# Altium PCB PowerChargingBoard_2025-02-05.pcbdoc
Units mil, origin at the board's own origin, x right, y up, seen from the top; angles counter-clockwise.
Board outline 3431.47 x 2732.98 mil, 2 copper layers (Top Layer, Bottom Layer); 44 components, 29 nets, 146 pads, 46 vias.
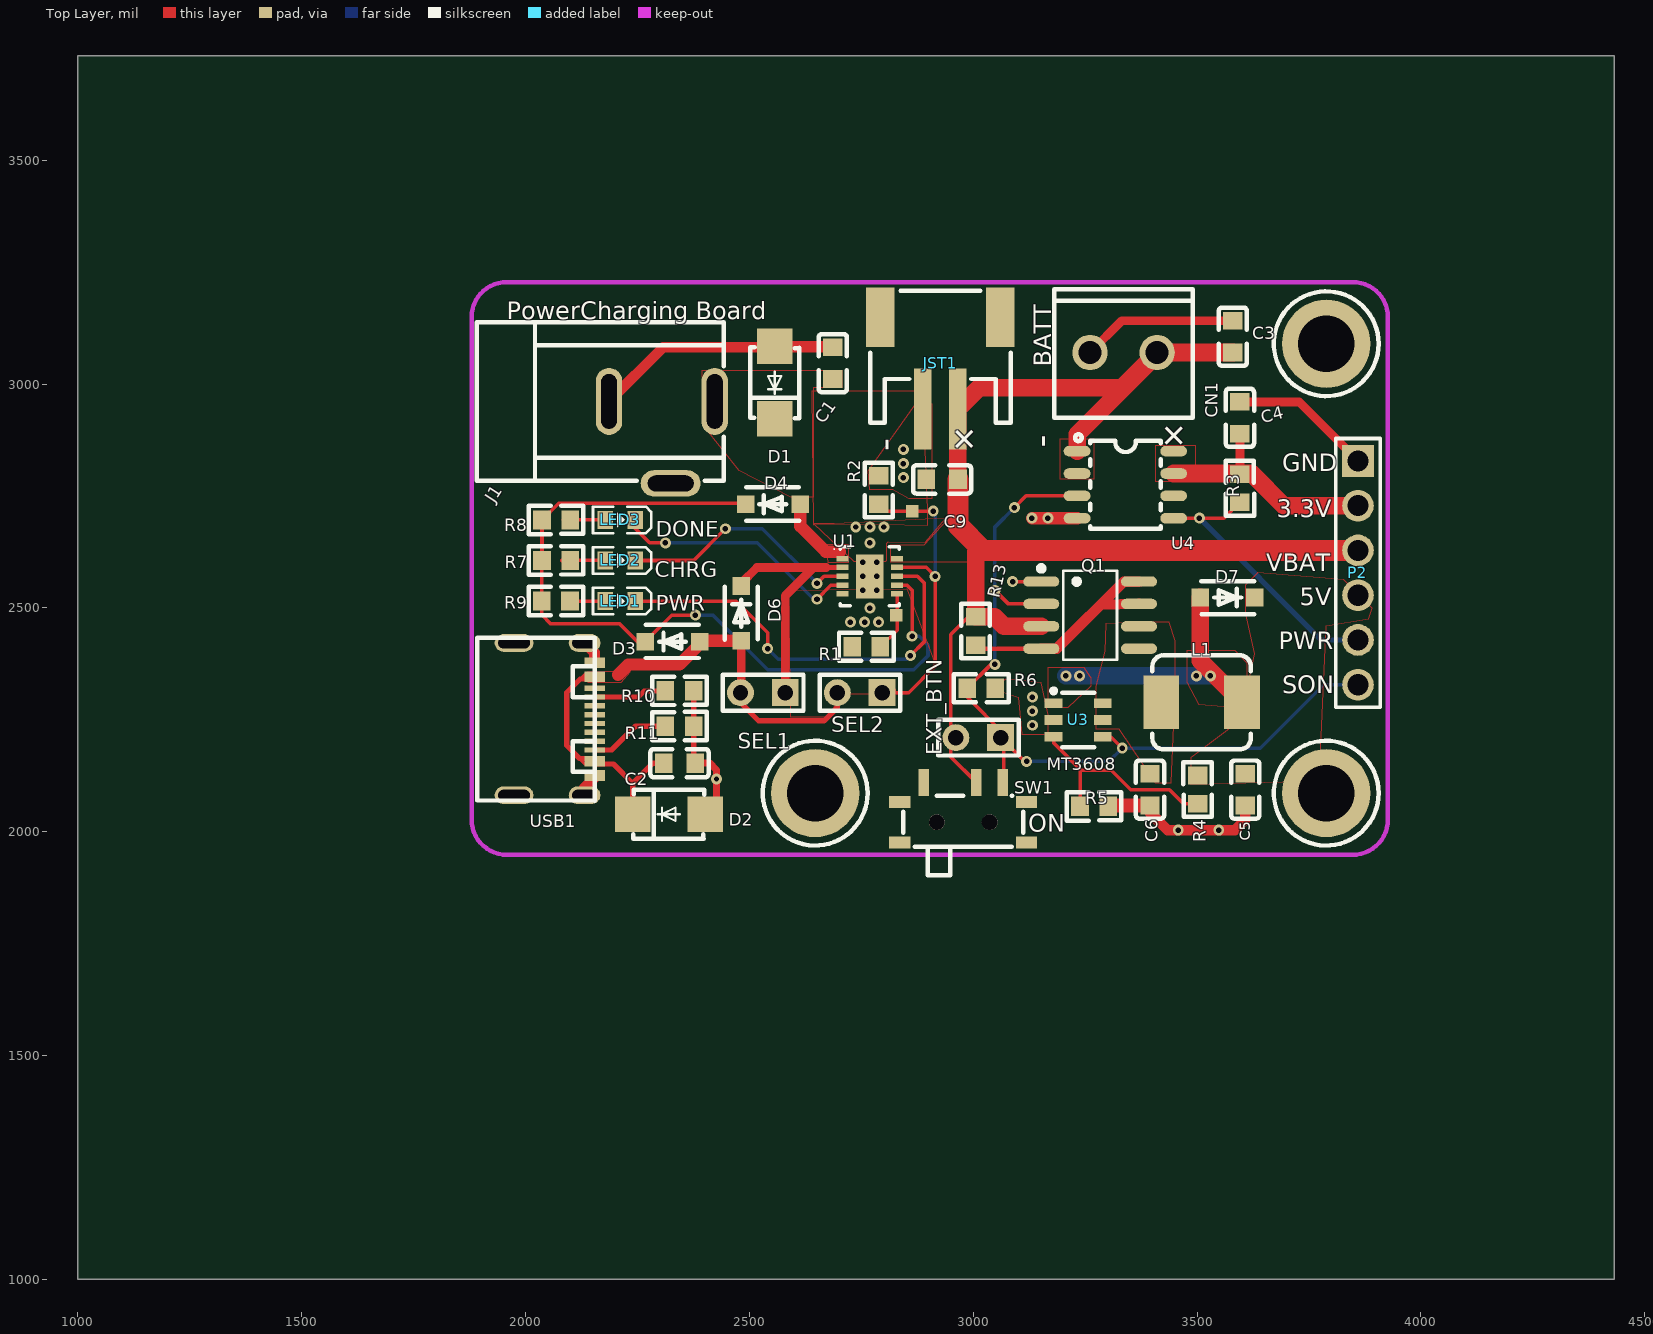
[diagram p0: Top Layer view]
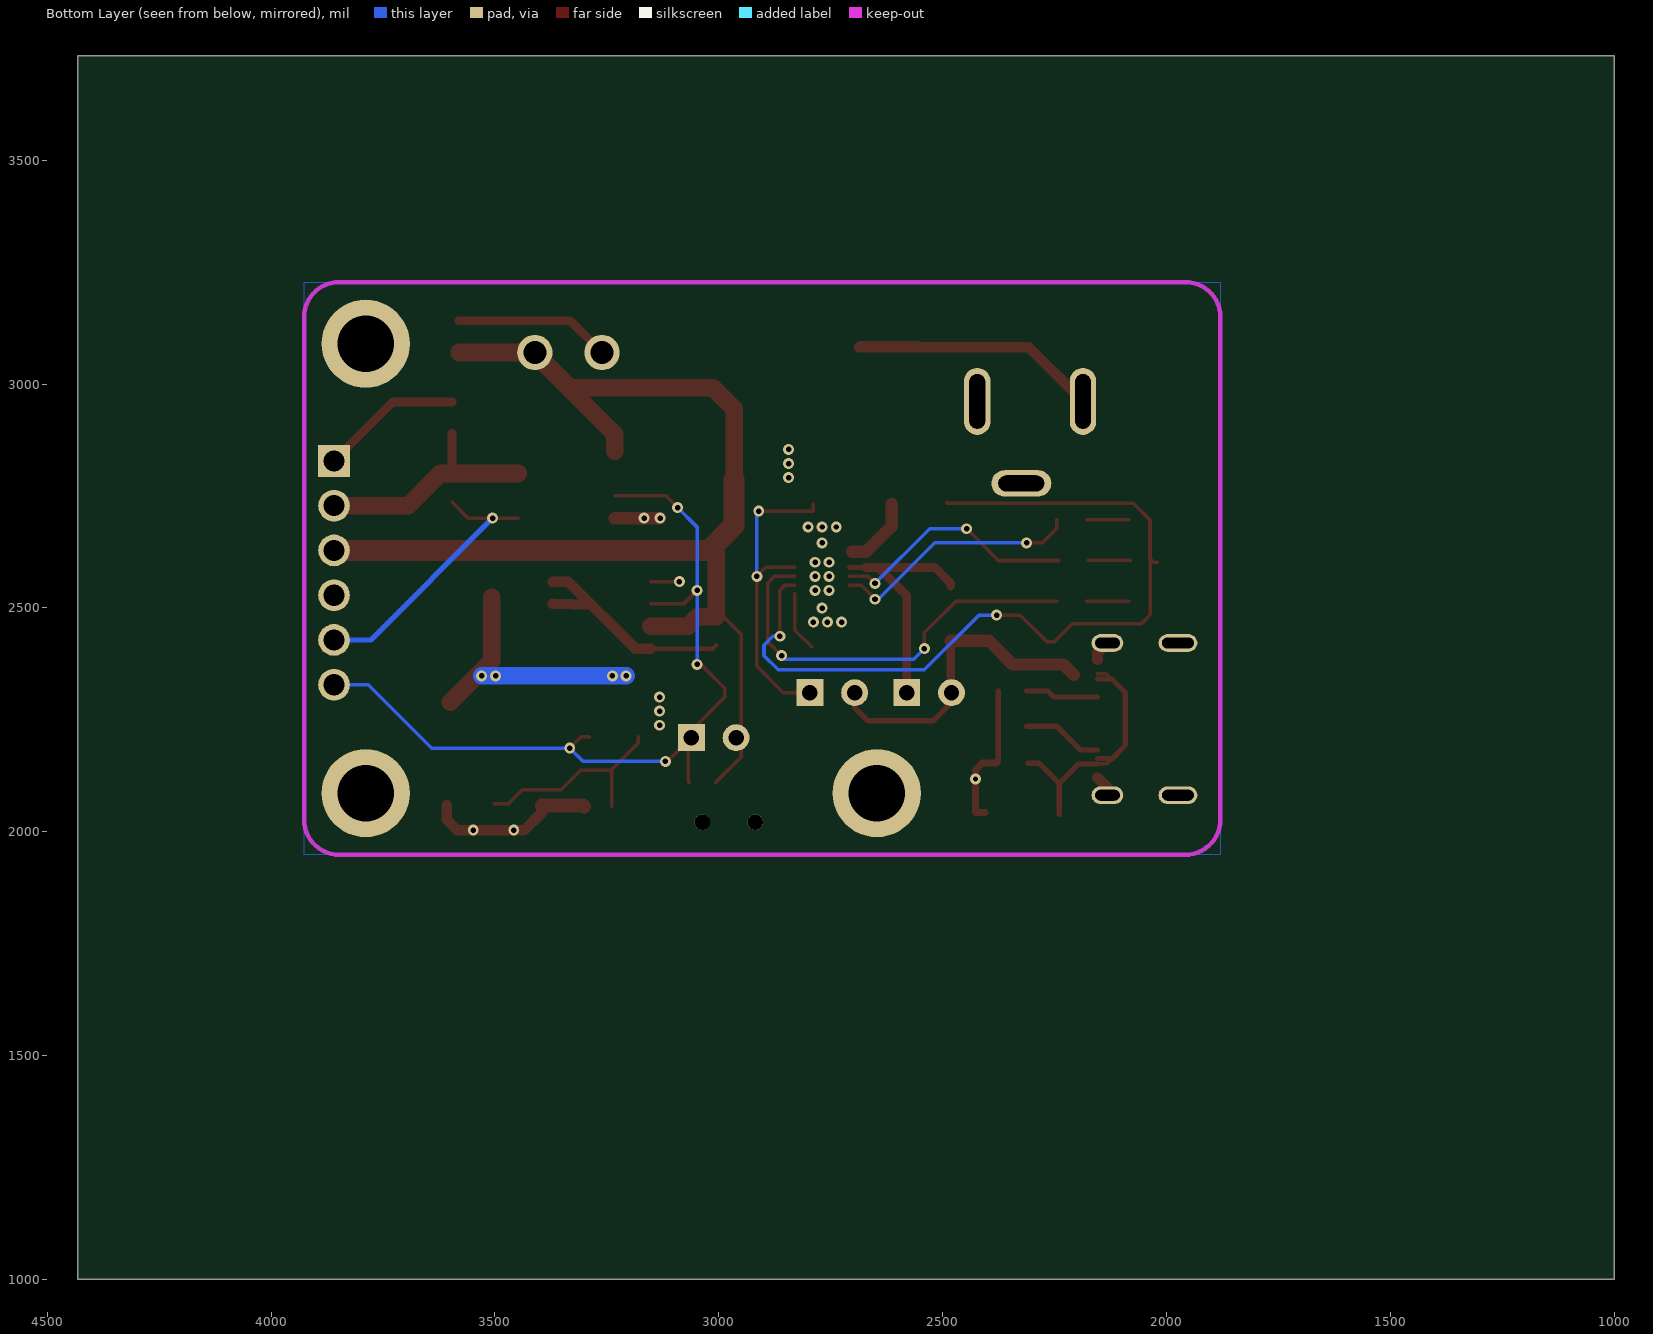
[diagram p1: Bottom Layer view, seen from below]

## Layer stack, top to bottom
Top Solder: solder mask 0.4, Solder Resist, Dk 3.5
Top Layer: signal copper 1.4
Dielectric1: dielectric 12.6, FR-4, Dk 4.8
Bottom Layer: signal copper 1.4
Bottom Solder: solder mask 0.4, Solder Resist, Dk 3.5

## Board outline
4431.47,1000 1000,1000 1000,3732.98 4431.47,3732.98

## Design rules (kind name [scope] priority, off if disabled: settings)
Clearance [All] p1: gap=10
PolygonConnect [All] p1: connectstyle=Relief reliefconductorwidth=10 reliefentries=4 polygonreliefangle="90 Angle" airgapwidth=10
RoutingVias [All] p1: holewidth=28 width=50 viastyle="Through Hole" minholewidth=28 minwidth=50 maxholewidth=28 maxwidth=50
SolderMaskExpansion [All] p1: expansion=4
Width [All] p1: maxlimit=10 minlimit=10 preferedwidth=10
30 further rules are at their usual default settings.

## Components (designator, comment, footprint, x,y, rotation, side; value= is the part's Value field where it differs from the comment)
C1 "4.7uF" C0603 2686.31,3046.88 r270 top
C2 "4.7uF" C0603 2343.79,2153.18 r180 top
C3 "10uF" C0603 3580.01,3105.94 r270 top
C4 "10uF" C0603 3595.76,2924.84 r270 top
C5 "22uF" C0603 3607.57,2094.13 r90 top
C6 "22uF" C0603 3394.97,2094.13 r90 top
C9 "4.7uF" C0603 2930.4,2787.04 r0 top
CN1 "MKDS1/2-3.81-1727010" CONN-TH_2P-P3.81_1727010 3335.91,3070.51 r180 top
D1 "SMAJ5.0A-E3/61" SMA_L4.3-W2.6-LS5.2-RD 2556.39,3003.58 r90 top
D2 "SMAJ5.0A-E3/61" SMA_L4.3-W2.6-LS5.2-RD 2320.17,2039.01 r0 top
D3 "MBR120VLSFT1G" SOD-123F_L2.8-W1.8-LS3.7-RD 2328.04,2424.84 r0 top
D4 "MBR120VLSFT1G" SOD-123F_L2.8-W1.8-LS3.7-RD 2552.41,2731.92 r0 top
D6 "MBR120VLSFT1G" SOD-123F_L2.8-W1.8-LS3.7-RD 2481.58,2487.83 r270 top
D7 "MBR120VLSFT1G" SOD-123F_L2.8-W1.8-LS3.7-RD 3568.2,2523.26 r180 top
EXT_BTN "Just a couple of 2.54-spaced pins" "1X02 2.54MM HOLES HEADERS PINS" 3061.31,2210.28 r270 top
J1 "DC-005-20A_C136744" DC-IN-TH_DC-005-20A 2304.42,2869.72 r0 top
JST1 "JST-PH-2-PIN" JST-PH-2-SMT-RA 2926.47,3046.88 r0 top
L1 "10uH" L2020 3510.13,2289.02 r180 top
LED1 "PWR" 0603-LED 2209.93,2515.39 r0 top
LED2 "CHRG" 0603-LED 2209.93,2605.94 r0 top
LED3 "DONE" 0603-LED 2209.93,2696.49 r0 top
P2 "Header-Female-2.54" HDR-6X1/2.54 3859.52,2578.38 r270 top
Q1 "IRF9389TRPBF" SOIC-8_L4.9-W3.9-P1.27-LS6.0-BL#1 3261.11,2483.89 r270 top
R1 "1.2k" R0603 2761.11,2413.02 r0 top
R2 "10k" R0603 2788.67,2763.42 r270 top
R3 "100k" R0603 3595.76,2767.36 r90 top
R4 "62k" R0603 3501.27,2094.13 r90 top
R5 "8.2k" R0603 3269.97,2056.74 r180 top
R6 "10k" R0603 3018,2320.51 r180 top
R7 "1k" R0603 2068.2,2605.94 r0 top
R8 "1k" R0603 2068.2,2696.49 r0 top
R9 "1k" R0603 2067.76,2515.39 r0 top
R10 "5.1k" R0603 2343.79,2314.6 r0 top
R11 "5.1k" R0603 2343.79,2235.86 r0 top
R13 "1M" R0603 3005.21,2448.46 r90 top
SEL1 "Just a couple of 2.54-spaced pins" "1X02 2.54MM HOLES HEADERS PINS" 2580.01,2310.66 r270 top
SEL2 "Just a couple of 2.54-spaced pins" "1X02 2.54MM HOLES HEADERS PINS" 2796.54,2310.66 r270 top
SW1 "MSK-12C02" SW-TH_MSK12C02 2977.65,2042.94 r0 top
U1 "MCP73837T-FCI/MF" DFN-MF10 2768.96,2570.48 r0 top
U3 "MT3608" SOT-23-6_L2.9-W1.6-P0.95-LS2.8-BR 3234.54,2249.65 r180 top
U4 "MCP1725-3302E/SN" SOIC-8_L4.9-W3.9-P1.27-LS6.0-BL#2 3339.85,2775.23 r270 top
USB1 "USB-310F" USB-C-SMD_20P-P0.50-L6.5-W8.9 2064.26,2251.61 r0 top
? "" ? 2902.84,1733.69 r0 top
? "" ? 1690.24,2586.25 r0 top

## Footprints (in the part's own frame and the unit in brackets; to place one, negate y for a bottom-side part, rotate by r counter-clockwise, add the part's x,y. Pads: shape width x height; smd on the part's side, far side on the other; paste and mask are expansions set on the pad)
"1X02 2.54MM HOLES HEADERS PINS" [mil]
  rect 60x60 hole 34.25 paste+0 mask+4: 1(-0.01,-0.02)
  round 60 hole 34.25 paste+0 mask+4: 2(-0.01,-100.02)
  silkscreen extent -40,-139 40,41
0603-LED [mm]
  rect 0.9x1 smd paste+0 mask+0.102: 1(-0.812,0) 2(0.888,0)
  silkscreen extent -1.51,-0.75 1.79,0.75
C0603 [mm]
  rect 1x1.1 smd paste+0 mask+0.102: 1(-0.901,0) 2(0.899,0)
  silkscreen extent -1.65,-0.8 1.65,0.8
CONN-TH_2P-P3.81_1727010 [mm]
  round 2 hole 1.3 paste+0 mask+0.051: 1(-1.904,0) 2(1.906,0)
  silkscreen extent -3.93,-3.6 3.93,3.7
DC-IN-TH_DC-005-20A [mm]
  oval 1.5x3.8 hole 0.9 slot 3.1 at 90 deg paste+0 mask+0.102: 1(3.001,2.325) 2(-2.999,2.325)
  oval 3.4x1.5 hole 0.9 slot 2.6 at 0 deg paste+0 mask+0.102: 3(0.5,-2.325)
  silkscreen extent -10.5,-2.17 3.5,6.83
DFN-MF10 [mil]
  rect 26.5x12.5 smd paste+0 mask+4: 1(-61,39) 2(-61,20) 3(-61,0) 4(-61,-20) 5(-61,-39) 6(61,-39) 7(61,-20) 8(61,0) 9(61,20) 10(61,39)
  rect 61.5x98.5 smd paste+0 mask+4: 11(0,0)
  silkscreen extent -80,-66 66,66
HDR-6X1/2.54 [mm]
  rect 1.8x1.8 hole 1.2 paste+0 mask+0.102: 1(-6.35,-0.001)
  round 1.8 hole 1.2 paste+0 mask+0.102: 2(-3.81,-0.001) 3(-1.27,-0.001) 4(1.27,-0.001) 5(3.81,-0.001) 6(6.35,-0.001)
  silkscreen extent -7.62,-1.27 7.62,1.27
JST-PH-2-SMT-RA [mil]
  rect 39.4x181.1 smd paste+0 mask+4: 1(39,-102.5) 2(-39,-102.5)
  rect 63x133.9 smd paste+0 mask+4: NC1(-134,102.5) NC2(134,102.5)
  silkscreen extent -157,-134 157,162
L2020 [mil]
  rect 80x120 smd paste+0 mask+4: 1(-89.98,-0.01) 2(90.02,-0.01)
  silkscreen extent -110,-105 110,105
R0603 [mm]
  rect 1x1.1 smd paste+0 mask+0.102: 1(-0.801,0) 2(0.799,0)
  silkscreen extent -1.55,-0.8 1.55,0.81
SMA_L4.3-W2.6-LS5.2-RD [mm]
  rect 2x2 smd paste+0 mask+0.102: 1(-2.057,0) 2(2.058,0)
  silkscreen extent -2.03,-1.4 2.01,1.4
SOD-123F_L2.8-W1.8-LS3.7-RD [mm]
  rect 1x1 smd paste+0 mask+0.051: 1(-1.55,-0.001) 2(1.55,-0.001)
  silkscreen extent -1.52,-0.93 1.49,0.95
SOIC-8_L4.9-W3.9-P1.27-LS6.0-BL#1 [mm]
  oval 0.588x2.045 smd paste+0 mask+0.051: 1(-1.905,-2.773) 2(-0.635,-2.773) 3(0.635,-2.773) 4(1.905,-2.773) 5(1.905,2.772) 6(0.635,2.772) 7(-0.635,2.772) 8(-1.905,2.772)
  silkscreen extent -2.8,-2.92 2.53,1.52
SOIC-8_L4.9-W3.9-P1.27-LS6.0-BL#2 [mm]
  oval 0.6x1.52 smd paste+0 mask+0.102: 1(-1.905,-2.741) 2(-0.635,-2.741) 3(0.635,-2.741) 4(1.905,-2.741) 5(1.905,2.739) 6(0.635,2.739) 7(-0.635,2.739) 8(-1.905,2.739)
  silkscreen extent -2.86,-2.86 2.5,2
SOT-23-6_L2.9-W1.6-P0.95-LS2.8-BR [mm]
  rect 1x0.55 smd paste+0 mask+0.051: 1(1.401,-0.95) 2(1.401,0) 3(1.401,0.95) 4(-1.4,0.95) 5(-1.4,0) 6(-1.4,-0.95)
  silkscreen extent -0.9,-1.78 1.52,1.55
SW-TH_MSK12C02 [mm]
  rect 0.6x1.524 smd paste+0 mask+0.051: 1(-2.251,1.7) 2(0.749,1.7) 3(2.249,1.7)
  rect 1.2x0.7 smd paste+0 mask+0.051: 4(-3.601,-1.7) 4(-3.601,0.6) 4(3.599,-1.7) 4(3.599,0.6)
  round 0.9 hole 0.9 unplated paste+0: ""(-1.501,-0.55) ""(1.5,-0.55)
  silkscreen extent -3.4,-3.55 3.4,0.95
USB-C-SMD_20P-P0.50-L6.5-W8.9 [mm]
  oval 2.2x1 hole 0.6 slot 1.8 at 0 deg paste+0 mask+0.102: 0(-2.288,-4.32) 0(-2.288,4.32)
  oval 1.8x1 hole 0.6 slot 1.4 at 0 deg paste+0 mask+0.102: 0(1.712,-4.32) 0(1.712,4.32)
  rect 1.15x0.3 smd paste+0 mask+0.102: A1(2.286,3.35) A4(2.286,2.55) A5(2.287,1.25) A6(2.287,0.249) A7(2.286,-0.25) A8(2.287,-1.25) A9(2.287,-2.55) A12(2.287,-3.35) B1(2.287,-3.05) B4(2.287,-2.25) B5(2.287,-1.75) B6(2.287,-0.749) B7(2.286,0.749) B8(2.287,1.75) B9(2.286,2.251) B12(2.286,3.051)
  silkscreen extent -4.39,-4.62 2.29,4.62
? [mil]

## Free pads (board coordinates)
  rect 27.56x27.56 smd paste+0 mask+4: 1(2828.04,2483.89) 2(2863.45,2716.18)
  round 196.85 hole 125.98 paste+0 mask+4: 5(2646.91,2086.26) 5(3788.65,3090.2) 5(3788.66,2086.26)

## Via types
v1: diameter 24.41, hole 12.2, Top Layer to Bottom Layer, tented both sides, 32 vias
v2: diameter 24.4, hole 12.2, Top Layer to Bottom Layer, tented both sides, 8 vias
v3: diameter 24.41, hole 12.6, Top Layer to Bottom Layer, tented both sides, 6 vias

## Nets (pads, with @x,y where several pads share a name; then routed paths per layer and width w, separated by ;. In a path a pad name is that pad's centre, name@x,y a point inside that pad or via, vN(x,y) a via of type N, cw(c..) or ccw(c..) an arc to the next point about the centre after c; other vN are vias at no path point)
+5V: C5.2 D7.1 P2.4 R4.2
D7_2: D7.2 L1.1 U3.1 | length 595.6
  Top Layer w39.37: D7.2 3507.17,2381.97 L1.1
  Bottom Layer w39.37: v3(3206.95,2348.08) v3(3237.61,2348.08) v3(3498.29,2348.08) v3(3529.79,2348.08)
GND: C1.1 C2.1 C3.1 C4.1 C5.1 C6.1 C9.1 CN1.2 D1.2 D2.2 J1.2 JST1.2 P2.1 Q1.1 R1.1 R2.1 R5.1 R6.1 R10.2 R11.2 U1.5 U1.11 U3.2 U4.4 USB1.0 USB1.A1 USB1.A12 USB1.B1 USB1.B12 | length 2368.8
  Top Layer w7.87: v1(3087.88,2558.7) 3151.76,2558.7 Q1.1@3151.96,2558.9
  Top Layer w11.81: USB1.0@2131.19,2422.47 2153.86,2399.8 USB1.A1@2153.86,2384.28 ; R10.2 R11.2 2375.29,2157.11 C2.1
  Top Layer w15.75: C2.1 2411.31,2153.18 2426.47,2138.02 2426.47,2042.97 D2.2@2405.22,2042.97
  Top Layer w19.68: CN1.2 3331.77,3141.37 C3.1 ; C4.1@3595.76,2960.27 3727.64,2960.27 P2.1
  Top Layer w23.62: USB1.0@2131.19,2082.32 2131.19,2097.76 USB1.A12@2153.91,2120.48 ; USB1.0@2131.19,2422.47 2153.86,2399.8 USB1.A1@2153.86,2384.28 ; J1.2 2307.36,3082.32 C1.1 2684.04,3084.58 D1.2 ; C6.1 3394.92,2042.96 3434.32,2003.56 3583.92,2003.56 3607.52,2027.16 C5.1
  Top Layer w27.56: v1(3131.19,2700.43) 3131.19,2700.23 U4.4
  Top Layer w31.5: R5.1@3301.46,2056.73 3303.43,2058.7 C6.1@3394.97,2058.7
  other v1: 3457.96,2003.58 3548.51,2003.58 3132.15,2237.84 3132.15,2269.34 3132.15,2300.84 2725.68,2468.14 2757.17,2468.14 2788.67,2468.14 2768.98,2499.64 2753.24,2539.01 2784.73,2539.01 2753.24,2570.51 2784.73,2570.51 2753.24,2602 2784.73,2602 2768.98,2645.31 2737.5,2680.74 2768.99,2680.74 2800.48,2680.74 3166.62,2700.43 2843.79,2790.98 2843.79,2822.48 2843.79,2853.97
  other v2: 2426.46,2117.75
LED1_1: LED1.1 R9.2 | length 94.1
  Top Layer w7.87: R9.2@2083.95,2515.38 LED1.1
LED2_1: LED2.1 R7.2 | length 93.6
  Top Layer w7.87: R7.2@2080.46,2605.94 LED2.1@2174.06,2605.94
LED3_1: LED3.1 R8.2 | length 93.6
  Top Layer w7.87: R8.2@2083.95,2696.49 R8.2 LED3.1@2177.55,2696.49
LED3_2: LED3.2 U1.4 | length 553
  Top Layer w7.87: LED3.2 2244.92,2677.25 2276.86,2645.31 v1(2312.29,2645.31) ; v3(2650.88,2519.33) 2682.06,2550.48 U1.4
  Bottom Layer w7.87: v1(2312.29,2645.31) 2517.3,2645.31 v3@2643.32,2519.28
NULL: 
ON_SIG: EXT_BTN.1 P2.6 Q1.2 R6.2 SW1.3 U3.4 U4.3 | length 1909.6
  Top Layer w7.87: R6.2 2986.52,2300.86 3068.22,2219.16 3068.22,2111.86 SW1.3 ; R6.2@2986.52,2320.56 3039.62,2373.66 v1(3048.51,2373.66) ; v1(3048.51,2539.01) 3078.66,2508.86 Q1.2 ; EXT_BTN.1 3114.47,2157.12 v1(3119.38,2157.12) ; v2(3091.82,2724.05) 3118,2750.23 U4.3 ; U3.4@3289.67,2212.24 3307.38,2212.24 v2@3332.97,2186.65
  Bottom Layer w7.87: v1(3048.51,2373.66) v1(3048.51,2539.01) 3048.51,2680.74 v2(3091.82,2724.05) ; v1(3119.38,2157.12) 3303.43,2157.12 v2@3332.97,2186.65 ; v2(3332.94,2186.66) 3641.02,2186.66 3782.82,2328.36 P2.6
PWR_GOOD: P2.5 R3.1 U4.5 | length 629.8
  Top Layer w7.87: U4.5 3560.13,2700.23 R3.1@3595.76,2735.86
  Bottom Layer w11.81: v2(3505.21,2700.43) 3777.26,2428.37 P2.5
R2_2: pad.2 R2.2 SEL2.1 U1.9 | length 770.5
  Top Layer w7.87: R2.2@2788.72,2731.96 2788.72,2716.16 v1(2910.72,2716.18) ; SEL2.1 2855.62,2310.66 2914.62,2369.76 ; U1.9 2894.7,2590.48 v1(2914.68,2570.5) 2914.68,2369.72
  Top Layer w11.81: SEL2.1@2773.91,2312.64 2817,2312.64 SEL2.1@2821.16,2316.79
  Bottom Layer w7.87: v1(2910.72,2716.18) 2914.68,2712.22 v1(2914.68,2570.5)
R13_1: Q1.4 Q1.7 Q1.8 R13.1 | length 515.9
  Top Layer w10: R13.1 3013.32,2408.86 Q1.4
  Top Layer w23.62: Q1.4 3186.12,2408.86 3335.92,2558.66 Q1.8@3370.22,2558.66 ; 3284.73,2507.51 Q1.7@3370.26,2508.9
S$2124: 
S$2126: 
S$2128: 
S$2130: 
SEL1_1: D6.1 SEL1.1 U1.2 | length 674.1
  Top Layer w11.81: 2611.56,2558.68 2643.36,2590.48 U1.2
  Top Layer w19.68: D6.1 2481.58,2554.76 2517.02,2590.19 2671.56,2590.48 2643.36,2590.48 ; SEL1.1 2580.02,2527.16 2643.32,2590.46 2663.02,2590.46
U1_3: LED2.2 U1.3 | length 553.4
  Top Layer w7.87: LED2.2@2240.99,2605.94 2375.28,2605.94 v1(2446.15,2676.81) ; v3(2650.88,2554.76) 2666.63,2570.48 U1.3
  Bottom Layer w7.87: v1(2446.15,2676.81) 2528.83,2676.81 v3(2650.88,2554.76)
U1_6: pad.1 R1.2 U1.6 | length 133.9
  Top Layer w7.87: R1.2@2792.62,2413.06 2830.02,2450.46 U1.6
U1_7: D3.1 D4.1 R7.1 R8.1 R9.1 U1.7 | length 2155.7
  Top Layer w7.87: R7.1@2020.96,2602 2028.83,2602 R7.1@2032.77,2605.94 ; R7.1@2032.72,2605.96 2036.72,2609.86 R8.1 2074.12,2733.86 2489.42,2733.86 D4.1@2489.42,2735.86 ; v2(2379.22,2483.89) 2326.06,2483.89 D3.1 2249.3,2424.84 2209.93,2464.2 2056.39,2464.2 2036.27,2484.32 2036.27,2515.38 2036.27,2696.05 R8.1 ; U1.7 2852.02,2550.48 2863.47,2539.03 v2(2863.47,2436.65) ; R7.1@2032.77,2605.94 R7.1@2036.71,2609.88 ; R7.1@2032.77,2605.94 R7.1@2036.71,2609.88 ; R7.1@2036.71,2609.88 R8.1 ; R7.1@2036.71,2609.88 R8.1
  Bottom Layer w7.87: v2(2379.22,2483.89) 2418.6,2483.89 2540.64,2361.84 2867.41,2361.84 2898.91,2393.34 2898.91,2416.96 2879.22,2436.65 v2(2863.47,2436.65)
U1_8: LED1.2 U1.8 | length 934.5
  Top Layer w7.87: LED1.2 2469.78,2515.38 2540.64,2444.52 v2(2540.64,2409.09) ; U1.8 2875.37,2570.45 2891.06,2554.77 2891.06,2424.85 v2(2859.54,2393.34)
  Bottom Layer w7.87: v2(2540.64,2409.09) 2564.27,2385.46 2851.62,2385.46 v2@2859.52,2393.36
U3_3: R4.1 R5.2 U3.3 | length 529.8
  Top Layer w7.87: U3.3 3179.42,2198.46 3240.42,2137.46 3308.32,2137.46 3351.62,2094.16 3438.32,2094.16 3469.72,2062.66 R4.1@3501.32,2062.66 ; 3199.62,2178.46 3238.52,2139.56 R5.2@3238.52,2056.76
USB1_A5: R10.1 USB1.A5 | length 163.7
  Top Layer w11.81: USB1.A5 2251.26,2300.81 2265.05,2314.6 R10.1
USB1_B5: R11.1 USB1.B5 | length 180
  Top Layer w11.81: USB1.B5 2192.24,2182.7 2245.4,2235.86 R11.1
VAC: C1.2 D1.1 D4.2 J1.1 U1.1 | length 161.4
  Top Layer w27.56: D4.2@2613.52,2731.96 2613.52,2682.66 2670.52,2625.66 2702.02,2625.66
VBAT: C3.2 C9.2 CN1.1 EXT_BTN.2 JST1.1 P2.3 Q1.3 R13.2 SW1.2 U1.10 U4.1 U4.2 | length 2876.4
  Top Layer w7.87: R13.2 2989.42,2479.96 2950.12,2440.56 2950.12,2166.93 SW1.2
  Top Layer w39.37: C9.2 2965.47,2787.04 JST1.1 3012.86,2991.78 3332.19,2991.78 CN1.1 ; 3015.22,2634.98 3005.2,2624.96 R13.2 3047.52,2479.96 3068.62,2458.86 Q1.3 ; U4.1 3231.99,2887.8 3414.68,3070.5 C3.2
  Top Layer w47.24: C9.2 2965.84,2684.66 3022.12,2628.38 P2.3
VBAT_O: C6.2 L1.2 Q1.5 Q1.6 U3.5
VCC: C4.2 P2.2 R3.2 U4.7 U4.8 | length 532.1
  Top Layer w19.68: R3.2@3595.76,2798.86 C4.2@3595.76,2889.4
  Top Layer w39.37: U4.7@3447.72,2800.26 3621.92,2800.26 3693.82,2728.36 P2.2
VUSB: C2.2 D2.1 D3.2 D6.2 SEL1.2 SEL2.2 USB1.A4 USB1.A9 USB1.B4 USB1.B9 | length 1456.7
  Top Layer w7.87: 2099.7,2184.68 2132.39,2151.98 USB1.A9@2153.91,2151.98 ; 2099.7,2318.54 2133.94,2352.78 USB1.A4@2153.86,2352.78
  Top Layer w11.81: USB1.B9@2153.82,2340.98 2122.12,2340.98 2091.82,2310.68 2091.82,2192.58 2120.62,2163.78 USB1.B4@2153.92,2163.78 ; USB1.A9 2196.22,2151.16 2239.12,2108.16 D2.1 2239.12,2107.66 2284.72,2153.16 C2.2 ; SEL1.2@2480.22,2310.46 2480.22,2288.36 2520.92,2247.66 2666.62,2247.66 2696.52,2277.56 SEL2.2
  Top Layer w19.68: SEL1.2 2481.58,2310.66 D6.2
  Top Layer w27.56: 2206.22,2350.46 2229.62,2373.66 2343.82,2373.66 2396.96,2426.8 D6.2
pads on no net: J1.3 JST1.NC1 JST1.NC2 SW1. SW1.1 SW1.4 U3.6 U4.6 USB1.A6 USB1.A7 USB1.A8 USB1.B6 USB1.B7 USB1.B8

## Polygon pours and split planes (outlines as drawn)
GND on Bottom Layer "Bottom Layer-GND" (solid, pour order 0): 3926.46,1948.45 3926.46,3227.98 1879.22,3227.98 1879.22,1948.45
GND on Top Layer "Top Layer-GND" (solid, pour order 30): 2733.21,2604.48 2804.71,2604.48 2806.21,2605.98 2806.21,2643.98 2810.21,2647.98 2892.71,2646.98 2938.21,2700.48 2689.71,2687.98 2643.21,2687.98
VAC on Top Layer "Top Layer-VAC" (solid, pour order 28): 2394.97,3031.14 2705.99,3031.14 2705.99,2991.76 2643,2991.76 2643,2822.47 2643,2747.67 2591.82,2747.67 2477.65,2806.72 2398.91,2905.15
GND on Top Layer "Top Layer-GND 1" (solid, pour order 26): 2642.5,2685.38 2794.98,2686.38 2898.41,2684.88 2898.91,2720.11 2887.1,2983.89 2639.06,2983.89
D7_2 on Top Layer "Top Layer-D7_2" (solid, pour order 24): 3167.61,2367.76 3246.35,2367.76 3262.1,2344.14 3262.1,2324.45 3210.92,2277.21 3167.61,2277.21
D7_2 on Top Layer "Top Layer-D7_2 1" (solid, pour order 22): 3505.21,2283.1 3477.65,2334.28 3477.65,2405.15 3583.95,2405.15 3611.51,2377.59 3612.49,2275.24
VCC on Top Layer "Top Layer-VCC" (solid, pour order 20): 3406.78,2861.84 3406.78,2783.1 3497.33,2783.1 3497.33,2861.84
VBAT_O on Top Layer "Top Layer-VBAT_O" (solid, pour order 18): 3273.91,2229.96 3325.09,2229.96 3406.78,2109.87 3442.21,2109.87 3451.08,2312.64 3451.08,2426.82 3438.28,2468.14 3367.41,2468.14 3296.55,2464.2 3293.6,2403.2 3273.91,2324.45
+5V on Top Layer "Top Layer-+5V" (solid, pour order 16): 3607.57,2487.83 3627.25,2397.28 3595.76,2247.67 3485.52,2164.99 3485.52,2105.94 3772.92,2113.81 3788.67,2460.26 3883.16,2476.01 3891.03,2499.63 3828.04,2562.63 3635.13,2578.38 3607.57,2550.82
GND on Top Layer "Top Layer-GND 2" (solid, pour order 14): 2587.88,2539.01 2851.66,2542.95 2914.66,2373.65 2851.66,2306.72 2705.99,2306.72 2674.5,2255.54 2591.82,2255.54
GND on Top Layer "Top Layer-GND 3" (solid, pour order 12): 3041.62,2320.51 3100.68,2300.83 3108.55,2218.15 3167.61,2218.15 3167.61,2261.46 3151.86,2332.33 3073.12,2340.2
GND on Top Layer "Top Layer-GND 4" (solid, pour order 10): 2871.35,2956.33 2906.78,2956.33 2906.78,2743.73 2855.6,2743.73 2820.17,2763.42 2768.99,2763.42 2765.05,2806.72
VBAT on Top Layer "Top Layer-VBAT" (solid, pour order 8): 2942.21,2696.49 2997.33,2637.43 2993.39,2602 2816.23,2602 2816.23,2641.37 2891.03,2641.37
VUSB on Top Layer "Top Layer-VUSB" (solid, pour order 6): 2139.06,2357.91 2139.06,2334.28 2213.87,2334.28 2233.55,2357.91
VAC on Top Layer "Top Layer-VAC 1" (solid, pour order 4): 2721.76,2602 2721.76,2641.37 2670.56,2641.37 2674.52,2602
VBAT on Top Layer "Top Layer-VBAT 1" (solid, pour order 2): 3194.18,2877.59 3268.99,2877.59 3268.99,2787.04 3194.18,2787.04

## Keep-outs
Keep-Out Layer:
  lines w10: 1879.22,2027.2 ccw(c1957.96,2027.2) 1957.96,1948.46 ; 1879.22,3149.24 cw(c1957.96,3149.24) 1957.96,3227.98 ; 3847.72,1948.46 ccw(c3847.72,2027.2) 3926.46,2027.2 ; 3847.72,3227.98 cw(c3847.72,3149.24) 3926.46,3149.24

## Silkscreen, mask and mechanical layers (free items; w line width, h text height)
Top Overlay:
  circle w9.84: c2646.92,2086.25 r117.05
  circle w9.84: c3788.65,2086.25 r117.05
  circle w9.84: c3788.65,3090.19 r117.05
  text "PowerCharging Board" at 1957.96,3145.31 h39.37
  text "BATT" at 3174.5,3039.01 h39.37 r90
  text "+" at 3490.65,2878.79 h59.05 r135
  text "+" at 3022.15,2870.91 h59.05 r135
  text "-" at 3180.4,2857.91 h59.05 r90
  text "-" at 2830.01,2850.03 h59.05 r90
  text "GND" at 3690.29,2804.95 h39.37
  text "3.3V" at 3678.41,2702.59 h39.37
  text "VBAT" at 3654.81,2582.31 h39.37
  text "5V" at 3729.63,2505.71 h39.37
  text "PWR" at 3682.37,2407.32 h39.37
  text "SON" at 3690.27,2308.83 h39.37
  text "ON" at 3123.31,1999.64 h39.37